# EAGLE board 24V AC SSR Board (EAGLE 7.3.0)
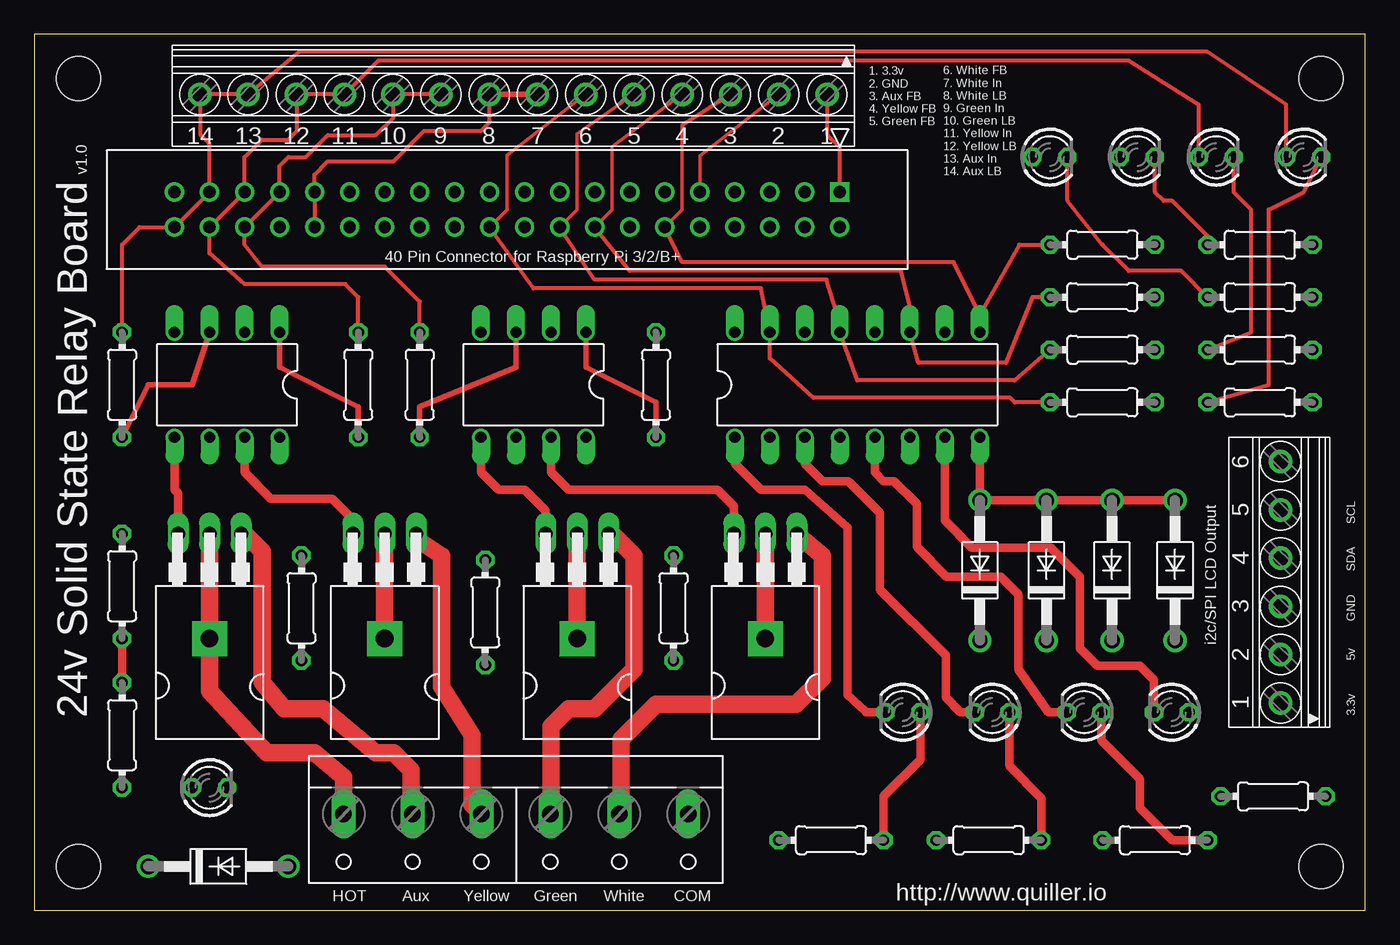
[diagram p0: board, top side]
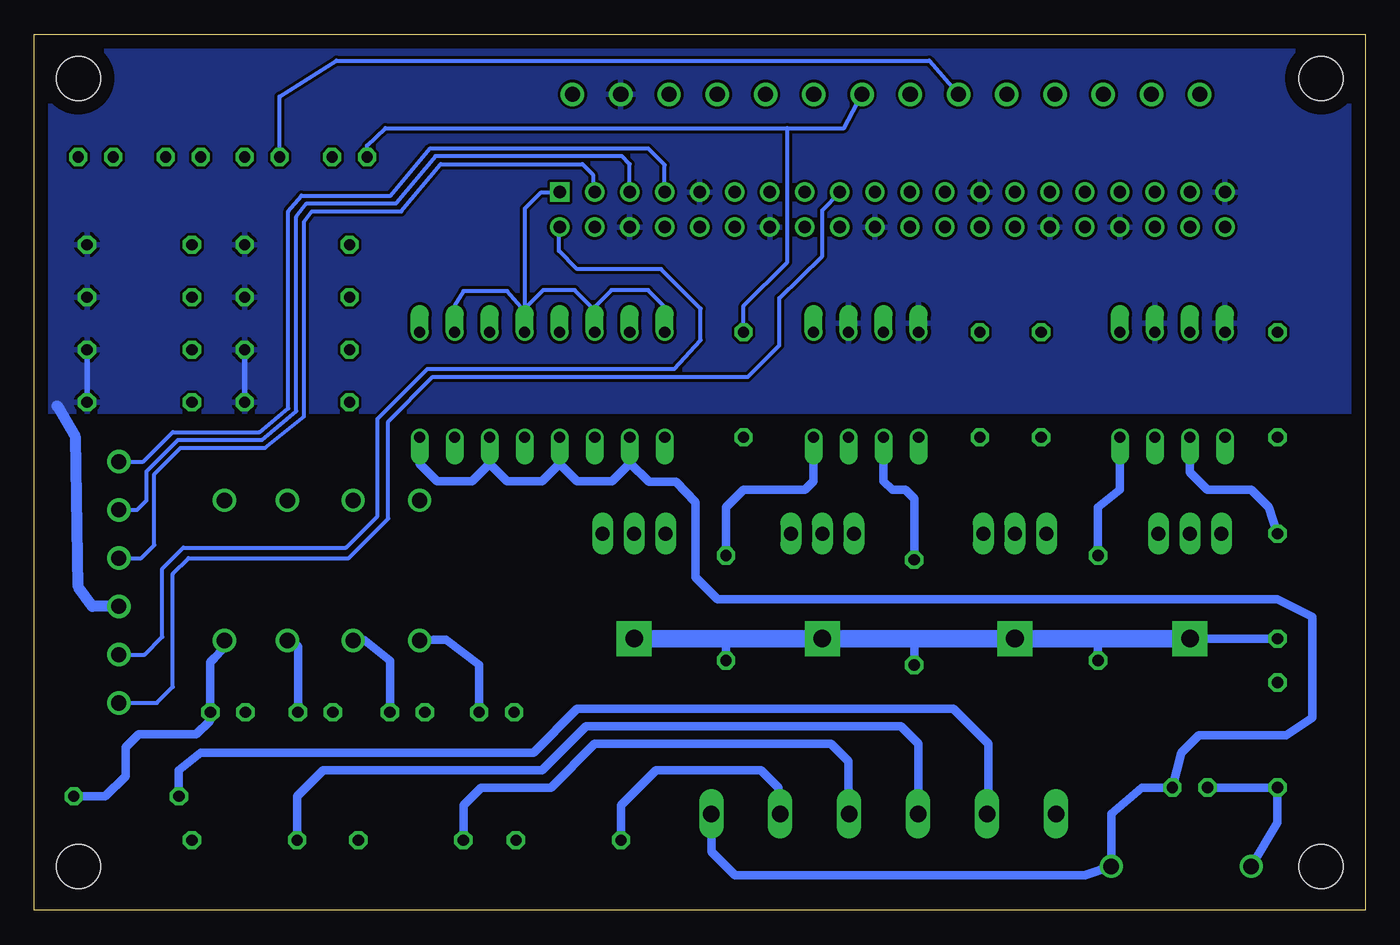
[diagram p1: board, bottom side, seen from below]

Size 96.52 x 63.5 mm. Coordinates in mm from the lower left corner, seen from the top.
Outline: 0,0 96.52,0 96.52,63.5 0,63.5 0,0
Copper layers (1*16): Top 0.035mm / dielectric 1.5mm / Bottom 0.035mm
Design rules "default": minimum track width 10mil, minimum drill 24mil, track to track 8mil, track to pad 8mil, pad to pad 8mil, via to via 8mil, smd to smd 8mil, copper to edge 40mil, drill to drill 8mil, minimum pad ring 10mil, minimum via ring 8mil, stop-mask expansion 4mil, vias tented up to drill 0mil, thermal gap 10mil
Holes 3.2 mm at 3.17,60.33 93.34,60.33 93.34,3.17 3.17,3.17

## Footprints (pad centres in the part's own frame; a part is rotated, then mirrored left to right if it is on the bottom)
DO41-10 = drill 1.118: A 5.08,0; C -5.08,0
3M_2540-6002UB = drill 0.889 square: 1 0,2.54 | drill 0.889: 2 0,0; 3 -2.54,2.54; 4 -2.54,0; 5 -5.08,2.54; 6 -5.08,0; 7 -7.62,2.54; 8 -7.62,0; 9 -10.16,2.54; 10 -10.16,0; 11 -12.7,2.54; 12 -12.7,0; 13 -15.24,2.54; 14 -15.24,0; 15 -17.78,2.54; 16 -17.78,0; 17 -20.32,2.54; 18 -20.32,0; 19 -22.86,2.54; 20 -22.86,0; 21 -25.4,2.54; 22 -25.4,0; 23 -27.94,2.54; 24 -27.94,0; 25 -30.48,2.54; 26 -30.48,0; 27 -33.02,2.54; 28 -33.02,0; 29 -35.56,2.54; 30 -35.56,0; 31 -38.1,2.54; 32 -38.1,0; 33 -40.64,2.54; 34 -40.64,0; 35 -43.18,2.54; 36 -43.18,0; 37 -45.72,2.54; 38 -45.72,0; 39 -48.26,2.54; 40 -48.26,0
LED3MM = drill 0.813 octagon: A -1.27,0; K 1.27,0
DIL16 = drill 0.813 offset: 1 -8.89,-3.81; 2 -6.35,-3.81; 3 -3.81,-3.81; 4 -1.27,-3.81; 5 1.27,-3.81; 6 3.81,-3.81; 7 6.35,-3.81; 8 8.89,-3.81; 9 8.89,3.81; 10 6.35,3.81; 11 3.81,3.81; 12 1.27,3.81; 13 -1.27,3.81; 14 -3.81,3.81; 15 -6.35,3.81; 16 -8.89,3.81
0204/7 = drill 0.813 octagon: 1 -3.81,0; 2 3.81,0
6-POS-SCREW-TERM-PT-3.5MM = drill 1.1 pad 1.7: 1 -10.5,-0.1; 2 -7,-0.1; 3 -3.5,-0.1; 4 0,-0.1; 5 3.5,-0.1; 6 7,-0.1
W237-6 = drill 1.194 long: 1 -12.5,-1.27; 2 -7.5,-1.27; 3 -2.5,-1.27; 4 2.5,-1.27; 5 7.5,-1.27; 6 12.5,-1.27
SOT82 = drill 1.016 long: 1 -2.286,-1.27; 2 0,-1.27; 3 2.286,-1.27
DIL08 = drill 0.813 offset: 1 -3.81,-3.81; 2 -1.27,-3.81; 3 1.27,-3.81; 4 3.81,-3.81; 5 3.81,3.81; 6 1.27,3.81; 7 -1.27,3.81; 8 -3.81,3.81
1751293 = drill 1.1 pad 1.7: 1 -10.5,-0.1; 2 -7,-0.1; 3 -3.5,-0.1; 4 0,-0.1; 5 3.5,-0.1; 6 7,-0.1; 7 10.5,-0.1; 8 14,-0.1; 9 17.5,-0.1; 10 21,-0.1; 11 24.5,-0.1; 12 28,-0.1; 13 31.5,-0.1; 14 35,-0.1

## Placement (x,y rotation side)
D1  1N4004  [DO41-10]  13.34,3.17 0 top
D2  1N4001  [DO41-10]  68.58,24.64 90 top
D3  1N4001  [DO41-10]  73.41,24.64 90 top
D4  1N4001  [DO41-10]  78.17,24.64 90 top
D5  1N4001  [DO41-10]  82.74,24.64 90 top
IN  30340-6002HB  [3M_2540-6002UB]  58.42,49.53 0 top
LED4  Red  [LED3MM]  12.7,8.89 0 top
LED_IN_A  Blue  [LED3MM]  92.08,54.61 0 top
LED_IN_G  Green  [LED3MM]  80.01,54.61 0 top
LED_IN_W  White  [LED3MM]  73.66,54.61 0 top
LED_IN_Y  Yellow  [LED3MM]  85.72,54.61 0 top
LED_OUT_A  Blue  [LED3MM]  82.49,14.35 180 top
LED_OUT_G  Green  [LED3MM]  69.47,14.35 180 top
LED_OUT_W  White  [LED3MM]  62.99,14.35 180 top
LED_OUT_Y  Yellow  [LED3MM]  76.14,14.35 180 top
OPTO-ISO  LTV-845  [DIL16]  59.69,38.1 0 top
R1  100  [0204/7]  46.35,21.91 270 top
R2  330  [0204/7]  45.09,38.1 270 top
R3  100  [0204/7]  32.7,21.59 270 top
R4  330  [0204/7]  27.94,38.1 270 top
R5  100  [0204/7]  19.37,21.91 270 top
R6  330  [0204/7]  23.5,38.1 270 top
R7  100  [0204/7]  88.9,44.45 0 top
R8  100  [0204/7]  88.9,48.26 0 top
R9  100  [0204/7]  88.9,40.64 0 top
R10  2.2K  [0204/7]  6.35,12.7 270 top
R11  2.2K  [0204/7]  57.78,5.08 0 top
R12  2.2K  [0204/7]  69.22,5.08 0 top
R13  2.2K  [0204/7]  81.28,5.08 0 top
R14  330  [0204/7]  6.35,38.1 270 top
R15  100  [0204/7]  88.9,36.83 0 top
R16  100  [0204/7]  6.35,23.5 270 top
R17  2.2K  [0204/7]  89.85,8.26 0 top
R18  100K  [0204/7]  77.47,36.83 0 top
R19  100K  [0204/7]  77.47,40.64 0 top
R20  100K  [0204/7]  77.47,44.45 0 top
R21  100K  [0204/7]  77.47,48.26 0 top
T3-  [6-POS-SCREW-TERM-PT-3.5MM]  90.3,25.53 90 top
TERM  OUT BLOCK  [W237-6]  34.92,5.71 180 top
TRIAC-1  BT134  [SOT82]  53.02,26.04 180 top
TRIAC-2  BT134  [SOT82]  39.37,26.04 180 top
TRIAC-3  BT134  [SOT82]  25.4,26.04 180 top
TRIAC-4  BT134  [SOT82]  12.7,26.04 180 top
U$5  TLP525G−4  [DIL08]  36.2,38.1 180 top
U$6  TLP525G−4  [DIL08]  13.97,38.1 180 top
X1  1751293  [1751293]  46.99,59.05 180 top

## Library data of the parts
D1-D5 = diode
IN = 3M_By_element14_Batch_1; MPN: 2540-6002UB; OC_FARNELL: 1368965; OC_NEWARK: 46F4732; PACKAGE: Four-Wall Header, 40way; SUPPLIER: 3M
LED4 LED_IN_A LED_IN_G LED_IN_W LED_IN_Y LED_OUT_A LED_OUT_G LED_OUT_W LED_OUT_Y = led
OPTO-ISO T3- TRIAC-1-TRIAC-4 U$5 U$6 = myhvac
R1-R21 = rcl
TERM = con-wago-500; OC_FARNELL: unknown; OC_NEWARK: unknown
X1 = myhvac; OC_FARNELL: unknown; OC_NEWARK: unknown

## Nets
3.3V-SRC2: IN.17 T3-.1
3.3V_SRC1: IN.1 OPTO-ISO.10 OPTO-ISO.12 OPTO-ISO.14 OPTO-ISO.16 X1.1
5V-SRC1: IN.2 T3-.2
+24V: R1.2 R3.2 R5.2 R10.1 R16.2 TERM.6 TRIAC-1.2 TRIAC-2.2 TRIAC-3.2 TRIAC-4.2
AUX_FEEDBACK: IN.12 OPTO-ISO.9 R21.1 X1.3
AUX_IN: IN.37 IN.40 LED_IN_A.A R14.1 X1.13 X1.14
AUX_OUT: R17.1 TERM.5 TRIAC-4.1
GCLK: IN.7 T3-.6
GND: IN.6 IN.9 IN.14 IN.20 IN.25 IN.30 IN.34 IN.39 R7.2 R8.2 R9.2 R15.2 R18.2 R19.2 R20.2 R21.2 T3-.3 U$5.2 U$5.4 U$6.2 U$6.4 X1.2
GREEN_FEEDBACK: IN.18 OPTO-ISO.13 R19.1 X1.5
GREEN_IN: IN.33 IN.36 LED_IN_G.A R4.1 X1.9 X1.10
GREEN_OUT: R12.1 TERM.3 TRIAC-2.1
N$1: TRIAC-1.3 U$5.7
N$2: R2.2 U$5.1
N$3: TRIAC-4.3 U$6.5
N$4: R1.1 U$5.8
N$5: TRIAC-3.3 U$6.7
N$6: R4.2 U$5.3
N$7: TRIAC-2.3 U$5.5
N$8: R3.1 U$5.6
N$9: LED_OUT_W.K OPTO-ISO.1
N$10: R6.2 U$6.1
N$11: LED_OUT_G.K OPTO-ISO.3
N$12: R5.1 U$6.8
N$13: LED_OUT_Y.K OPTO-ISO.5
N$14: LED_OUT_A.K OPTO-ISO.7
N$17: LED_IN_W.K R7.1
N$18: LED_IN_G.K R8.1
N$20: LED_IN_Y.K R9.1
N$21: D2.C LED_OUT_W.A R11.2
N$22: D3.C LED_OUT_G.A R12.2
N$23: D4.C LED_OUT_Y.A R13.2
N$24: D1.C LED4.A R10.2
N$27: R14.2 U$6.3
N$28: LED_IN_A.K R15.1
N$29: R16.1 U$6.6
N$30: D5.C LED_OUT_A.A R17.2
SCL: IN.5 T3-.5
SDA: IN.3 T3-.4
V-: D1.A D2.A D3.A D4.A D5.A LED4.K OPTO-ISO.2 OPTO-ISO.4 OPTO-ISO.6 OPTO-ISO.8 TERM.1
WHITE_FEEDBACK: IN.22 OPTO-ISO.15 R18.1 X1.6
WHITE_IN: IN.31 IN.32 LED_IN_W.A R2.1 X1.7 X1.8
WHITE_OUT: R11.1 TERM.2 TRIAC-1.1
YELLOW_FEEDBACK: IN.16 OPTO-ISO.11 R20.1 X1.4
YELLOW_IN: IN.35 IN.38 LED_IN_Y.A R6.1 X1.11 X1.12
YELLOW_OUT: R13.1 TERM.4 TRIAC-3.1

## Tracks (layer width: path | path; a pad name or v marks a point on that pad's centre or on a via)
3.3V-SRC2
  Bottom 0.305: T3-.1 87.65,15.03 86.49,16.19 86.49,24.38 85.34,25.53 73.72,25.53 70.87,28.38 70.87,35.43 67.63,38.67 44.77,38.67 42.48,40.96 42.48,44.39 39.37,47.43 39.37,50.74 IN.17
3.3V_SRC1
  Top 0.305: IN.1 58.42,55.31 57.53,56.2 57.53,59.11 X1.1
  Bottom 0.305: OPTO-ISO.10 66.04,43.81 65.41,44.9 62.23,44.9 60.96,43.43 | OPTO-ISO.16 50.8,43.75 52.01,44.96 54.67,44.96 56.01,43.62 56.01,42.04 OPTO-ISO.14 55.88,43.5 57.34,44.96 59.63,44.96 61.15,43.43 61.15,42.1 OPTO-ISO.12 60.96,43.43 | IN.1 58.48,52.01 59.82,52.01 60.96,50.86 60.96,43.43
5V-SRC1
  Bottom 0.305: T3-.2 88.53,18.53 87.25,19.81 87.25,24.77 85.72,26.29 73.91,26.29 71.63,28.57 71.63,35.62 68.01,39.24 50.1,39.24 48.2,41.34 48.2,43.62 51.05,46.48 57.15,46.48 58.48,47.82 58.48,49.47 IN.2
+24V  (via drill 1.27 pad 2.54)
  Top 0.61: R10.1 R16.2
  Top 1.27: TERM.6 22.43,9.64 20.32,11.43 16.83,11.43 12.7,15.88 v12.7,19.68 TRIAC-4.2 | TRIAC-3.2 v25.4,19.68 | TRIAC-2.2 v39.37,19.68 | TRIAC-1.2 v53.02,19.68
  Bottom 0.61: R16.2 v12.7,19.68 | R5.2 19.37,19.68 | R3.2 32.7,19.68 | R1.2 46.35,19.68
  Bottom 1.27: v12.7,19.68 19.37,19.68 v25.4,19.68 32.7,19.68 v39.37,19.68 46.35,19.68 v53.02,19.68
AUX_FEEDBACK
  Top 0.254: IN.12 46.99,50.8 46.99,56.92 X1.3
  Top 0.305: OPTO-ISO.9 68.58,43.18 | 68.58,43.18 71.44,48.26 R21.1 | 68.58,43.18 66.67,46.99 46.99,46.99 IN.12
AUX_IN
  Top 0.305: R14.1 6.35,48.26 7.62,49.53 IN.40 IN.37 12.7,55.56 12.06,56.2 12.06,59.08 X1.14 X1.13 19.2,62.23 85.09,62.23 90.81,58.42 LED_IN_A.A
AUX_OUT
  Top 1.27: TERM.5 27.3,7.11 27.3,10.16 26.04,11.43 24.77,11.43 20.95,14.61 18.1,14.61 16.51,16.51 16.51,26.04 15.24,27.3 TRIAC-4.1
  Bottom 0.61: R17.1 86.04,10.16 84.45,11.43 60.33,11.43 57.15,14.61 29.84,14.61 27.3,12.06 27.3,7.11 TERM.5
GCLK
  Bottom 0.305: T3-.6 88.63,32.53 86.49,34.67 80.2,34.67 78.11,36.39 78.11,50.67 77.15,51.82 70.67,51.82 67.82,55.24 52.01,55.24 50.8,54.04 IN.7
GND
  Top 0.254: IN.9 48.26,54.7 X1.2
  Bottom 0.406: R18.2 R19.2 | R15.2 R9.2
  Bottom 0.813: T3-.3 92.32,22.03 93.34,23.43 93.53,34.29 94.87,36.58
  pour Bottom: 0.64,62.67 0.83,36.2 95.5,36.2 95.89,62.87
GREEN_FEEDBACK
  Top 0.254: IN.18 39.37,50.8 39.37,56.3 X1.5
  Top 0.305: R19.1 71.12,38.42 59.69,38.42 OPTO-ISO.13 58.42,42.55 57.47,45.72 40.64,45.72 IN.18
GREEN_IN
  Top 0.305: R4.1 27.94,44.13 25.4,46.67 16.51,46.67 15.24,48.26 IN.36 IN.33 17.78,53.98 18.41,54.61 19.68,54.61 21.27,56.2 24.77,56.2 26.04,57.47 26.04,59.11 X1.10 X1.9
  Bottom 0.305: LED_IN_G.A 78.74,58.99 74.61,61.59 31.61,61.59 X1.9
GREEN_OUT
  Top 1.27: TERM.3 37.47,7.03 37.47,13.34 38.73,14.61 40.64,14.61 43.5,17.46 43.5,25.72 41.91,27.3 TRIAC-2.1
  Bottom 0.61: R12.1 65.41,7.62 64.14,8.89 59.05,8.89 55.88,12.06 38.73,12.06 37.47,10.79 37.47,7.03 TERM.3
N$1
  Top 0.61: U$5.7 37.47,31.75 38.73,30.48 49.53,30.48 50.74,29.27 TRIAC-1.3
N$2
  Top 0.406: R2.2 45.09,36.83 40.01,39.37 U$5.1
N$3
  Top 0.61: TRIAC-4.3 10.41,30.23 10.16,30.48 U$6.5
N$4
  Bottom 0.61: R1.1 46.35,29.21 45.09,30.48 40.64,30.48 40.01,31.11 U$5.8
N$5
  Top 0.61: U$6.7 15.24,31.75 17.14,29.84 21.59,29.84 23.11,28.32 TRIAC-3.3
N$6
  Top 0.406: R4.2 27.94,36.51 34.92,39.37 U$5.3
N$7
  Top 0.61: U$5.5 32.38,31.75 33.66,30.48 35.56,30.48 37.08,28.96 TRIAC-2.3
N$8
  Bottom 0.61: R3.1 32.7,29.84 33.34,30.48 34.29,30.48 34.92,31.11 U$5.6
N$9
  Top 0.61: OPTO-ISO.1 50.8,32.38 52.7,30.48 55.88,30.48 58.99,27.75 58.99,15.62 60.26,14.41 60.33,14.35 LED_OUT_W.K
N$10
  Top 0.406: R6.2 23.5,36.51 17.78,39.37 U$6.1
N$11
  Top 0.61: OPTO-ISO.3 55.88,32.38 57.15,31.11 59.05,31.11 61.34,28.83 61.34,23.24 66.1,18.48 66.1,15.43 67.18,14.35 LED_OUT_G.K
N$12
  Bottom 0.61: R5.1 19.37,29.21 17.78,30.48 U$6.8
N$13
  Top 0.61: OPTO-ISO.5 60.96,31.75 61.59,31.11 62.36,31.11 64.01,29.46 64.01,26.35 66.17,24.19 70.1,24.19 71.37,22.92 71.37,17.46 73.53,14.35 LED_OUT_Y.K
N$14
  Top 0.61: OPTO-ISO.7 66.04,28.26 68.01,26.29 73.72,26.29 75.82,24.19 75.82,18.99 77.09,17.72 80.2,17.72 81.22,16.7 LED_OUT_A.K
N$17
  Top 0.305: R7.1 83.19,46.35 79.38,46.35 77.47,48.26 74.93,51.44 LED_IN_W.K
N$18
  Top 0.305: R8.1 85.09,48.9 82.55,51.44 81.92,51.44 81.28,52.07 LED_IN_G.K
N$20
  Top 0.305: R9.1 88.27,41.91 88.27,50.8 87,52.07 LED_IN_Y.K
N$21
  Top 0.61: R11.2 61.59,8.26 64.26,10.92 LED_OUT_W.A
  Bottom 0.61: 68.64,19.68 D2.C 67.56,19.62 66.67,19.62 64.26,17.78 LED_OUT_W.A
N$22
  Top 0.61: R12.2 73.03,8.13 70.74,10.48 LED_OUT_G.A
  Bottom 0.61: LED_OUT_G.A 70.74,18.1 72.58,19.56 D3.C
N$23
  Top 0.61: R13.2 82.55,5.08 80.2,7.43 80.2,9.53 77.41,12.32 LED_OUT_Y.A
  Bottom 0.61: LED_OUT_Y.A 77.41,19.11 77.85,19.56 D4.C
N$24
  Bottom 0.61: LED4.A R10.2 6.35,6.35 D1.C
N$27
  Top 0.406: R14.2 8.26,38.1 11.43,38.1 U$6.3
N$28
  Top 0.305: R15.1 89.53,38.1 89.53,50.8 92.08,52.07 LED_IN_A.K
N$29
  Bottom 0.61: R16.1 6.99,29.21 8.26,30.48 11.43,30.48 12.7,31.75 U$6.6
N$30
  Bottom 0.61: R17.2 91.38,8.26 89.92,9.72 89.92,11.81 88.96,12.76 84.77,12.76 83.82,13.72 83.82,14.29 LED_OUT_A.A 83.76,17.97 83.44,18.29 82.87,18.92 D5.C
SCL
  Bottom 0.305: IN.5 53.34,54.1 53.91,54.67 67.44,54.67 70.29,51.24 76.77,51.24 77.53,50.29 77.53,36.2 80.01,34.1 86.11,34.1 88.39,31.81 88.39,29.72 89.08,29.03 T3-.5
SDA
  Bottom 0.305: T3-.4 88.77,25.53 87.82,26.48 87.82,31.62 85.92,33.53 79.82,33.53 76.96,35.81 76.96,49.91 76.39,50.67 69.91,50.67 67.06,54.1 56.77,54.1 56.01,53.34 56.01,52.2 IN.3
V-
  Top 0.61: D5.A D4.A D3.A D2.A OPTO-ISO.8
  Bottom 0.61: TERM.1 47.42,4.25 45.72,2.54 20.32,2.54 D1.A 18.41,6.99 16.19,8.89 LED4.K 13.34,11.43 12.06,12.7 5.71,12.7 3.81,13.97 3.81,21.27 6.35,22.54 46.99,22.54 48.58,24.13 48.58,29.59 49.97,31.05 51.94,31.05 53.34,32.45 | OPTO-ISO.2 53.34,32.45 | 53.34,32.45 53.34,32.38 54.61,31.11 57.15,31.11 58.42,32.38 | OPTO-ISO.4 58.42,32.38 | 58.42,32.38 59.69,31.11 62.23,31.11 63.5,32.38 | OPTO-ISO.6 63.5,32.38 | 63.5,32.38 64.77,31.11 67.31,31.11 68.58,32.38 OPTO-ISO.8
WHITE_FEEDBACK
  Top 0.254: IN.22 34.29,50.8 34.29,54.73 X1.6
  Top 0.305: IN.22 36.2,45.09 52.7,45.09 OPTO-ISO.15 53.34,40.01 56.52,37.15 70.8,37.15 71.12,36.83 R18.1
WHITE_IN
  Top 0.305: IN.32 IN.31 20.32,53.34 21.27,54.29 26.04,54.29 28.26,56.52 32.38,56.52 33.02,57.15 33.02,59.12 X1.8
  Top 0.406: X1.7 X1.8
  Bottom 0.305: 41.91,56.71 37.8,56.71 X1.7 | R2.1 45.09,43.81 41.91,46.99 41.91,56.71 | LED_IN_W.A 72.39,55.44 71.06,56.71 41.91,56.71
WHITE_OUT
  Top 1.27: TERM.2 42.55,6.15 42.55,12.38 45.09,14.92 55.24,14.92 57.15,16.83 57.15,25.72 55.31,27.24 TRIAC-1.1
  Bottom 0.61: R11.1 53.98,7.62 51.44,10.16 43.81,10.16 42.55,8.89 42.55,7.11 TERM.2
YELLOW_FEEDBACK
  Top 0.254: IN.16 41.91,50.8 41.91,55.34 X1.4
  Top 0.305: R20.1 72.39,44.45 70.48,39.69 64.14,39.69 OPTO-ISO.11 63.5,43.81 62.87,46.35 43.18,46.35 IN.16
YELLOW_IN
  Top 0.305: LED_IN_Y.A 84.45,58.42 79.38,61.59 24.93,61.59 X1.11 X1.12 19.05,59.09 19.05,56.52 18.41,55.88 16.51,55.88 15.24,54.61 IN.35 IN.38 12.7,47.62 15.24,45.4 22.54,45.4 23.5,44.45 R6.1
YELLOW_OUT
  Top 1.27: TERM.4 31.75,7.66 31.75,12.7 29.53,16.19 29.53,25.72 27.69,26.92 TRIAC-3.1
  Bottom 0.61: R13.1 77.47,8.26 75.56,10.16 59.69,10.16 56.52,13.34 33.66,13.34 32.38,12.06 32.38,7.03 TERM.4

## Text on the board
tNames: 1. 3.3v / 2. GND / 3. Aux FB / 4. Yellow FB / 5. Green FB | v1.0 | 6. White FB / 7. White In / 8. White LB / 9. Green In / 10. Green LB / 11. Yellow In / 12. Yellow LB / 13. Aux In / 14. Aux LB | 40 Pin Connector for Raspberry Pi 3/2/B+ | SCL | SDA | GND | i2c/SPI LCD Output | 5v | 24v Solid State Relay Board | 3.3v | http://www.quiller.io | HOT | Aux | Yellow | Green | White | COM
tValues: 1N4001 | 1N4001 | 1N4001 | 1N4001 | 1N4001